# EAGLE board fCPU (EAGLE 7.6.0)

Size 97 x 70 mm. Coordinates in mm from the lower left corner, seen from the top.
Outline: 0,0 97,0 97,70 0,70 0,0
Copper layers (1*16): Top 0.035mm / dielectric 1.5mm / Bottom 0.035mm
Design rules "default": minimum track width 10mil, minimum drill 24mil, track to track 8mil, track to pad 8mil, pad to pad 8mil, via to via 8mil, smd to smd 8mil, copper to edge 40mil, drill to drill 8mil, minimum pad ring 10mil, minimum via ring 8mil, stop-mask expansion 4mil, vias tented up to drill 0mil, thermal gap 10mil

## Footprints (pad centres in the part's own frame; a part is rotated, then mirrored left to right if it is on the bottom)
DIL16 = drill 0.813 long: 1 -8.89,-3.81; 2 -6.35,-3.81; 3 -3.81,-3.81; 4 -1.27,-3.81; 5 1.27,-3.81; 6 3.81,-3.81; 7 6.35,-3.81; 8 8.89,-3.81; 9 8.89,3.81; 10 6.35,3.81; 11 3.81,3.81; 12 1.27,3.81; 13 -1.27,3.81; 14 -3.81,3.81; 15 -6.35,3.81; 16 -8.89,3.81
B3F-10XX = drill 1.016 long: 1 -3.251,2.261; 2 3.251,2.261; 3 -3.251,-2.261; 4 3.251,-2.261
7SEG-13 = drill 0.813 long: 1 -5.08,-7.62; 2 -2.54,-7.62; 3 0,-7.62; 4 2.54,-7.62; 5 5.08,-7.62; 6 5.08,7.62; 7 2.54,7.62; 8 0,7.62; 9 -2.54,7.62; 10 -5.08,7.62
1X12 = drill 1.016 long: 1 -13.97,0; 2 -11.43,0; 3 -8.89,0; 4 -6.35,0; 5 -3.81,0; 6 -1.27,0; 7 1.27,0; 8 3.81,0; 9 6.35,0; 10 8.89,0; 11 11.43,0; 12 13.97,0
EDG-04 = drill 0.813 long: 1 -3.81,-3.81; 2 -1.27,-3.81; 3 1.27,-3.81; 4 3.81,-3.81; 5 3.81,3.81; 6 1.27,3.81; 7 -1.27,3.81; 8 -3.81,3.81
1X04 = drill 1.016 long: 1 -3.81,0; 2 -1.27,0; 3 1.27,0; 4 3.81,0
1206 = smd 1.6 x 1.803: A -1.422,0; C 1.422,0
R1206 = smd 1.6 x 1.803: 1 -1.422,0; 2 1.422,0
DIL20 = drill 0.813 long: 1 -11.43,-3.81; 2 -8.89,-3.81; 3 -6.35,-3.81; 4 -3.81,-3.81; 5 -1.27,-3.81; 6 1.27,-3.81; 7 3.81,-3.81; 8 6.35,-3.81; 9 8.89,-3.81; 10 11.43,-3.81; 11 11.43,3.81; 12 8.89,3.81; 13 6.35,3.81; 14 3.81,3.81; 15 1.27,3.81; 16 -1.27,3.81; 17 -3.81,3.81; 18 -6.35,3.81; 19 -8.89,3.81; 20 -11.43,3.81
SIP10 = drill 0.6 long: 1 -11.46,0; 2 -8.92,0; 3 -6.38,0; 4 -3.84,0; 5 -1.3,0; 6 1.24,0; 7 3.78,0; 8 6.32,0; 9 8.86,0; 10 11.4,0

## Placement (x,y rotation side)
ADDER_74LS283N  74LS283N  [DIL16]  44,57 270 top
CLEAR_REGISTER_1  [B3F-10XX]  24,15.5 90 top
CLEAR_REGISTER_2  [B3F-10XX]  24.5,34 90 top
CLOCK_REGISTER_1  [B3F-10XX]  10.5,15.5 270 top
CLOCK_REGISTER_2  [B3F-10XX]  10.5,34 270 top
DIGIT_0_ANODE  [7SEG-13]  26,53 0 top
DISPLAY_DRIVER_74LS47  74LS47N  [DIL16]  9,57.5 270 top
EXTERNAL_CONTROL_INPUT  [1X12]  95,30 90 top
INPUT_DEVICE_1  [EDG-04]  72,17 90 top
INPUT_DEVICE_2  [EDG-04]  71.5,35.5 90 top
JP_CLOCK_IN  [1X04]  47.5,2 0 top
LED_POWER  [1206]  69.5,48 180 top
OUTPUTS  [1X04]  91,67.5 0 top
R_100_O  [R1206]  26,67.5 180 top
REGISTER_1_SN74LS273  74273N  [DIL20]  46.5,20.5 0 top
REGISTER_2_SN74LS273  74273N  [DIL20]  46,36 0 top
RESISTOR_INPUT_DEVICES  [SIP10]  74,4 180 top
RESISTOR_SWITCHES  [SIP10]  16,4 180 top

## Library data of the parts
ADDER_74LS283N DISPLAY_DRIVER_74LS47 REGISTER_1_SN74LS273 REGISTER_2_SN74LS273 = 74xx-us
CLEAR_REGISTER_1 CLEAR_REGISTER_2 CLOCK_REGISTER_1 CLOCK_REGISTER_2 = switch-omron; MPN: B3F-1000; OC_FARNELL: 176432; OC_NEWARK: 36M3542
DIGIT_0_ANODE INPUT_DEVICE_1 INPUT_DEVICE_2 = special
EXTERNAL_CONTROL_INPUT LED_POWER R_100_O = adafruit
JP_CLOCK_IN OUTPUTS = pinhead
RESISTOR_INPUT_DEVICES RESISTOR_SWITCHES = resistor-sip

## Nets
CLEAR_REGISTER_1_TO_GND: CLEAR_REGISTER_1.1 RESISTOR_SWITCHES.4
CLEAR_REGISTER_2_TO_GND: CLEAR_REGISTER_2.1 RESISTOR_SWITCHES.5
DTA_BUS_0: ADDER_74LS283N.4 DISPLAY_DRIVER_74LS47.7
DTA_BUS_1: ADDER_74LS283N.1 DISPLAY_DRIVER_74LS47.1
DTA_BUS_2: ADDER_74LS283N.13 DISPLAY_DRIVER_74LS47.2
DTA_BUS_3: ADDER_74LS283N.10 DISPLAY_DRIVER_74LS47.6
GND: ADDER_74LS283N.7 ADDER_74LS283N.8 DISPLAY_DRIVER_74LS47.8 JP_CLOCK_IN.1 OUTPUTS.1 REGISTER_1_SN74LS273.10 REGISTER_1_SN74LS273.13 REGISTER_1_SN74LS273.14 REGISTER_1_SN74LS273.17 REGISTER_1_SN74LS273.18 REGISTER_2_SN74LS273.10 REGISTER_2_SN74LS273.13 REGISTER_2_SN74LS273.14 REGISTER_2_SN74LS273.17 REGISTER_2_SN74LS273.18 RESISTOR_INPUT_DEVICES.1 RESISTOR_SWITCHES.1
LED_POWER_TO_GND: LED_POWER.C RESISTOR_SWITCHES.9
N$1: DIGIT_0_ANODE.8 R_100_O.1
REGISTER_1_CLK: CLOCK_REGISTER_1.4 EXTERNAL_CONTROL_INPUT.9 REGISTER_1_SN74LS273.11 RESISTOR_SWITCHES.2
REGISTER_1_CLR: CLEAR_REGISTER_1.4 EXTERNAL_CONTROL_INPUT.10 REGISTER_1_SN74LS273.1
REGISTER_1_IN_BIT_0: EXTERNAL_CONTROL_INPUT.1 INPUT_DEVICE_1.1 REGISTER_1_SN74LS273.3 RESISTOR_INPUT_DEVICES.2
REGISTER_1_IN_BIT_1: EXTERNAL_CONTROL_INPUT.2 INPUT_DEVICE_1.2 REGISTER_1_SN74LS273.4 RESISTOR_INPUT_DEVICES.3
REGISTER_1_IN_BIT_2: EXTERNAL_CONTROL_INPUT.3 INPUT_DEVICE_1.3 REGISTER_1_SN74LS273.7 RESISTOR_INPUT_DEVICES.4
REGISTER_1_IN_BIT_3: EXTERNAL_CONTROL_INPUT.4 INPUT_DEVICE_1.4 REGISTER_1_SN74LS273.8 RESISTOR_INPUT_DEVICES.5
REGISTER_1_OUT_BIT_0: ADDER_74LS283N.5 REGISTER_1_SN74LS273.2
REGISTER_1_OUT_BIT_1: ADDER_74LS283N.3 REGISTER_1_SN74LS273.5
REGISTER_1_OUT_BIT_2: ADDER_74LS283N.14 REGISTER_1_SN74LS273.6
REGISTER_1_OUT_BIT_3: ADDER_74LS283N.12 REGISTER_1_SN74LS273.9
REGISTER_2_CLK: CLOCK_REGISTER_2.4 EXTERNAL_CONTROL_INPUT.11 REGISTER_2_SN74LS273.11 RESISTOR_SWITCHES.3
REGISTER_2_CLR: CLEAR_REGISTER_2.4 EXTERNAL_CONTROL_INPUT.12 REGISTER_2_SN74LS273.1
REGISTER_2_IN_BIT_0: EXTERNAL_CONTROL_INPUT.5 INPUT_DEVICE_2.1 REGISTER_2_SN74LS273.3 RESISTOR_INPUT_DEVICES.6
REGISTER_2_IN_BIT_1: EXTERNAL_CONTROL_INPUT.6 INPUT_DEVICE_2.2 REGISTER_2_SN74LS273.4 RESISTOR_INPUT_DEVICES.7
REGISTER_2_IN_BIT_2: EXTERNAL_CONTROL_INPUT.7 INPUT_DEVICE_2.3 REGISTER_2_SN74LS273.7 RESISTOR_INPUT_DEVICES.8
REGISTER_2_IN_BIT_3: EXTERNAL_CONTROL_INPUT.8 INPUT_DEVICE_2.4 REGISTER_2_SN74LS273.8 RESISTOR_INPUT_DEVICES.9
REGISTER_2_OUT_BIT_0: ADDER_74LS283N.6 REGISTER_2_SN74LS273.2
REGISTER_2_OUT_BIT_1: ADDER_74LS283N.2 REGISTER_2_SN74LS273.5
REGISTER_2_OUT_BIT_2: ADDER_74LS283N.15 REGISTER_2_SN74LS273.6
REGISTER_2_OUT_BIT_3: ADDER_74LS283N.11 REGISTER_2_SN74LS273.9
SEG_1_DA: DIGIT_0_ANODE.7 DISPLAY_DRIVER_74LS47.13
SEG_1_DB: DIGIT_0_ANODE.6 DISPLAY_DRIVER_74LS47.12
SEG_1_DC: DIGIT_0_ANODE.4 DISPLAY_DRIVER_74LS47.11
SEG_1_DD: DIGIT_0_ANODE.2 DISPLAY_DRIVER_74LS47.10
SEG_1_DE: DIGIT_0_ANODE.1 DISPLAY_DRIVER_74LS47.9
SEG_1_DF: DIGIT_0_ANODE.9 DISPLAY_DRIVER_74LS47.15
SEG_1_DG: DIGIT_0_ANODE.10 DISPLAY_DRIVER_74LS47.14
TMR555_OUTPUT: JP_CLOCK_IN.3 OUTPUTS.3
TMR555_OUTPUT_REVERSE: JP_CLOCK_IN.4 OUTPUTS.4
VCC: ADDER_74LS283N.16 CLOCK_REGISTER_1.1 CLOCK_REGISTER_2.1 DISPLAY_DRIVER_74LS47.3 DISPLAY_DRIVER_74LS47.4 DISPLAY_DRIVER_74LS47.5 DISPLAY_DRIVER_74LS47.16 INPUT_DEVICE_1.5 INPUT_DEVICE_1.6 INPUT_DEVICE_1.7 INPUT_DEVICE_1.8 INPUT_DEVICE_2.5 INPUT_DEVICE_2.6 INPUT_DEVICE_2.7 INPUT_DEVICE_2.8 JP_CLOCK_IN.2 LED_POWER.A OUTPUTS.2 R_100_O.2 REGISTER_1_SN74LS273.20 REGISTER_2_SN74LS273.20

## Tracks (layer width: path | path; a pad name or v marks a point on that pad's centre or on a via)
CLEAR_REGISTER_1_TO_GND  (1 unrouted)
CLEAR_REGISTER_2_TO_GND  (1 unrouted)
DTA_BUS_0  (1 unrouted)
DTA_BUS_1  (1 unrouted)
DTA_BUS_2  (1 unrouted)
DTA_BUS_3  (1 unrouted)
GND  (16 unrouted)
LED_POWER_TO_GND  (1 unrouted)
N$1  (1 unrouted)
REGISTER_1_CLK  (3 unrouted)
REGISTER_1_CLR  (2 unrouted)
REGISTER_1_IN_BIT_0  (3 unrouted)
REGISTER_1_IN_BIT_1  (3 unrouted)
REGISTER_1_IN_BIT_2  (3 unrouted)
REGISTER_1_IN_BIT_3  (3 unrouted)
REGISTER_1_OUT_BIT_0  (1 unrouted)
REGISTER_1_OUT_BIT_1  (1 unrouted)
REGISTER_1_OUT_BIT_2  (1 unrouted)
REGISTER_1_OUT_BIT_3  (1 unrouted)
REGISTER_2_CLK  (3 unrouted)
REGISTER_2_CLR  (2 unrouted)
REGISTER_2_IN_BIT_0  (3 unrouted)
REGISTER_2_IN_BIT_1  (3 unrouted)
REGISTER_2_IN_BIT_2  (3 unrouted)
REGISTER_2_IN_BIT_3  (3 unrouted)
REGISTER_2_OUT_BIT_0  (1 unrouted)
REGISTER_2_OUT_BIT_1  (1 unrouted)
REGISTER_2_OUT_BIT_2  (1 unrouted)
REGISTER_2_OUT_BIT_3  (1 unrouted)
SEG_1_DA  (1 unrouted)
SEG_1_DB  (1 unrouted)
SEG_1_DC  (1 unrouted)
SEG_1_DD  (1 unrouted)
SEG_1_DE  (1 unrouted)
SEG_1_DF  (1 unrouted)
SEG_1_DG  (1 unrouted)
TMR555_OUTPUT  (1 unrouted)
TMR555_OUTPUT_REVERSE  (1 unrouted)
VCC  (20 unrouted)

## Text on the board
tNames: VCC | GND | EX_CLK | EX_CLK_R | fCPU | fCPU | v 1 | https://bit.ly/2LOkVFg | + | R_2_CLR | R_2_CLK | R_1_CLR | R_1_CLK | R_2_B3 | R_2_B2 | R_2_B1 | R_2_B0 | R_1_B3 | R_1_B2 | R_1_B1 | R_1_B0 | INPUTS | EX_CLCK | EX_CLK_R | GND | VCC | GND | GND
bNames: www.FredericTorres.com | MadeInTheUSB.net | PCBv1 - 2019.10